# Altium PCB PWR_PCB_1_3.PcbDoc
Units mm, origin at the board's own origin, x right, y up, seen from the top; angles counter-clockwise.
Board outline 89 x 89 mm, 2 copper layers (Top Layer, Bottom Layer); 25 components, 9 nets, 60 pads, 0 vias.
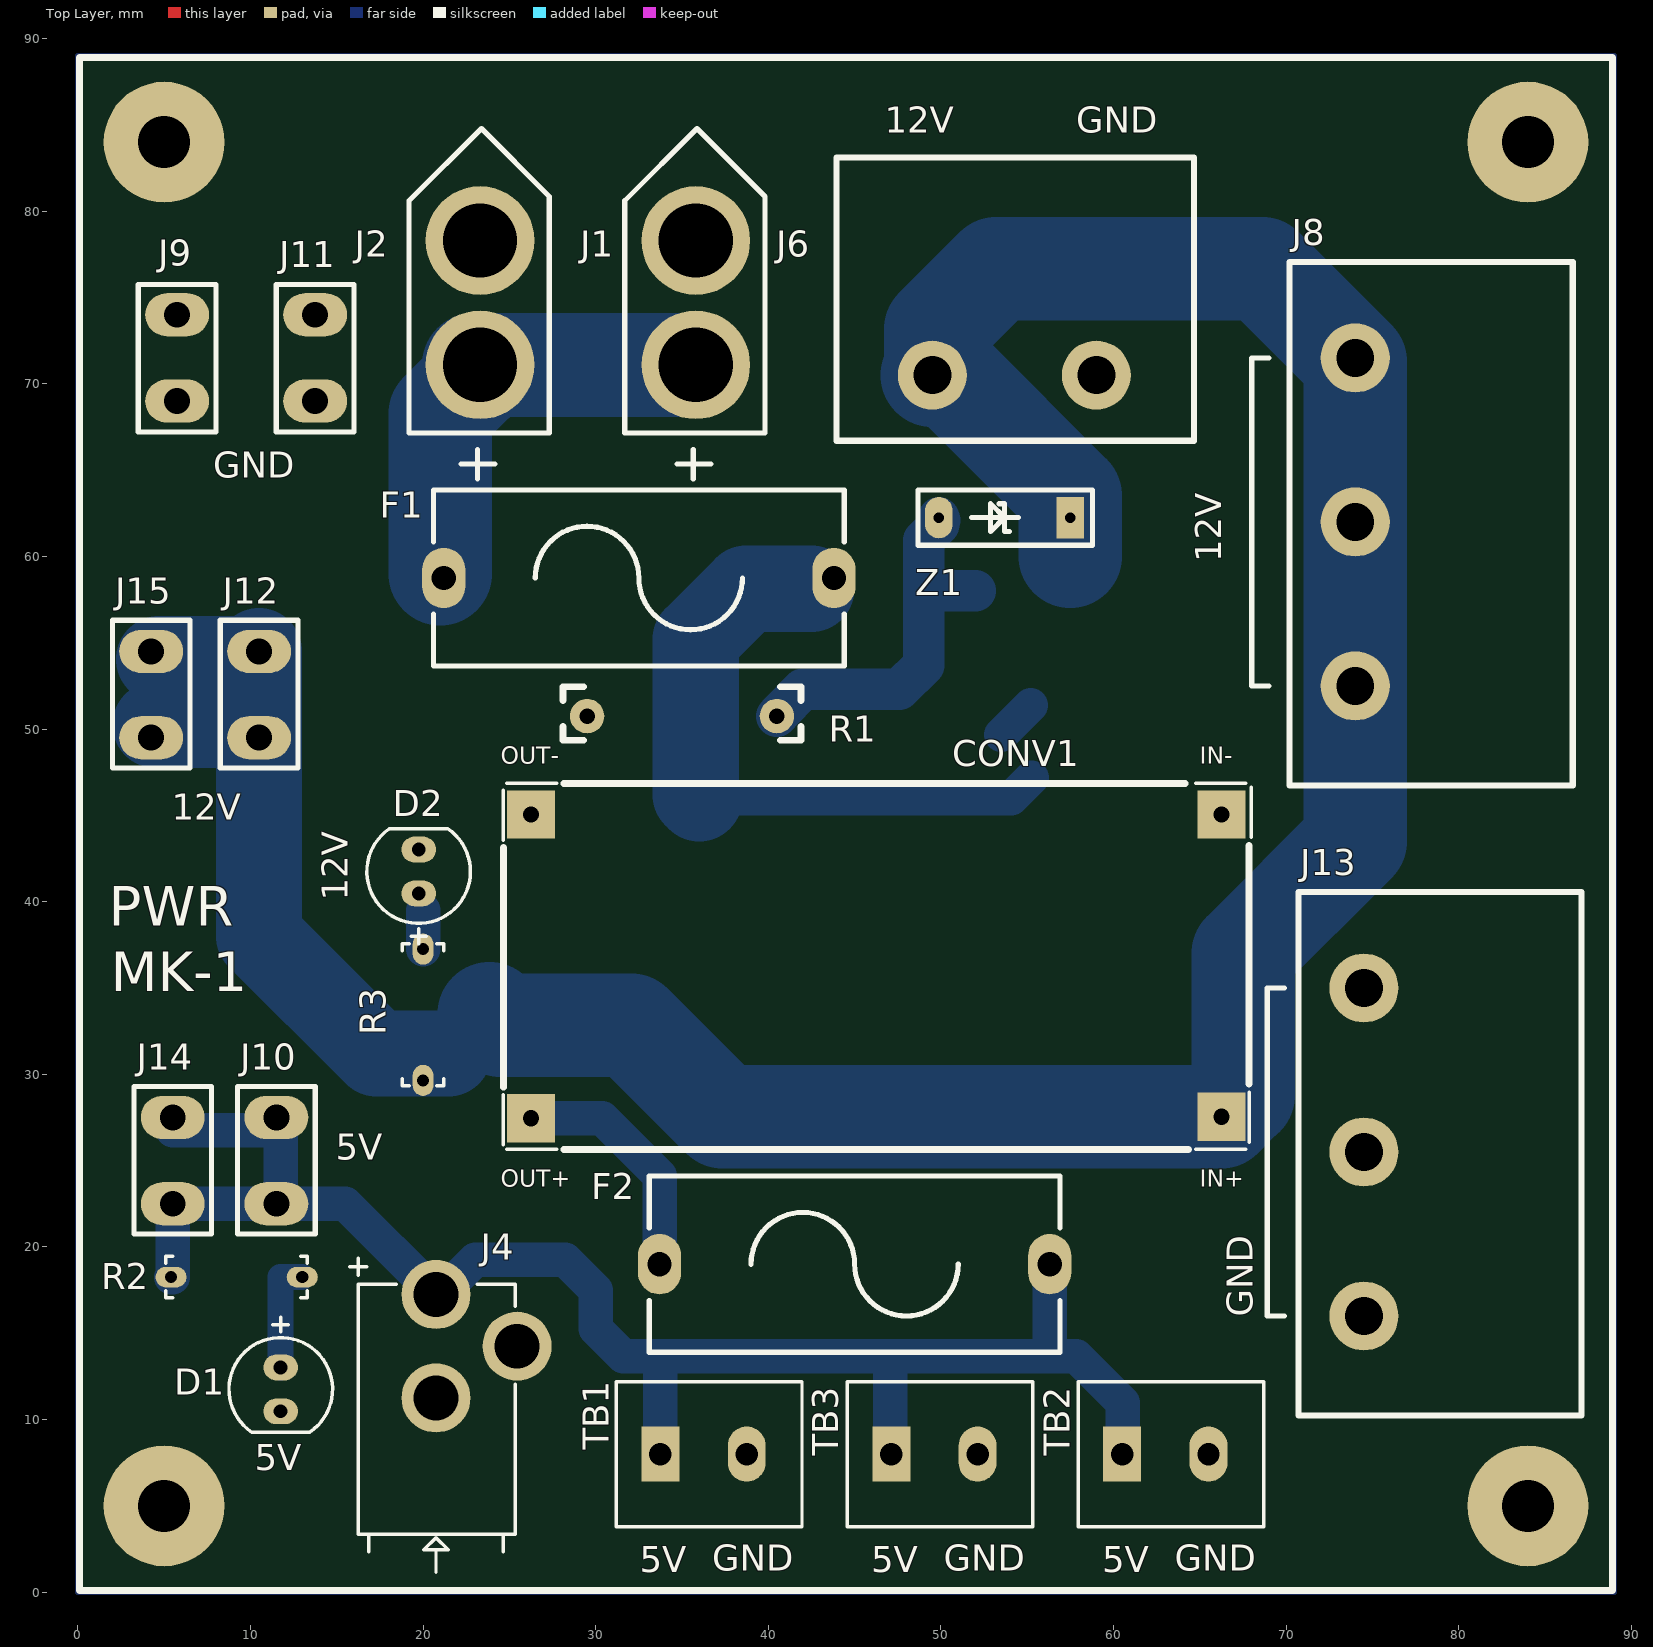
[diagram p0: Top Layer view]
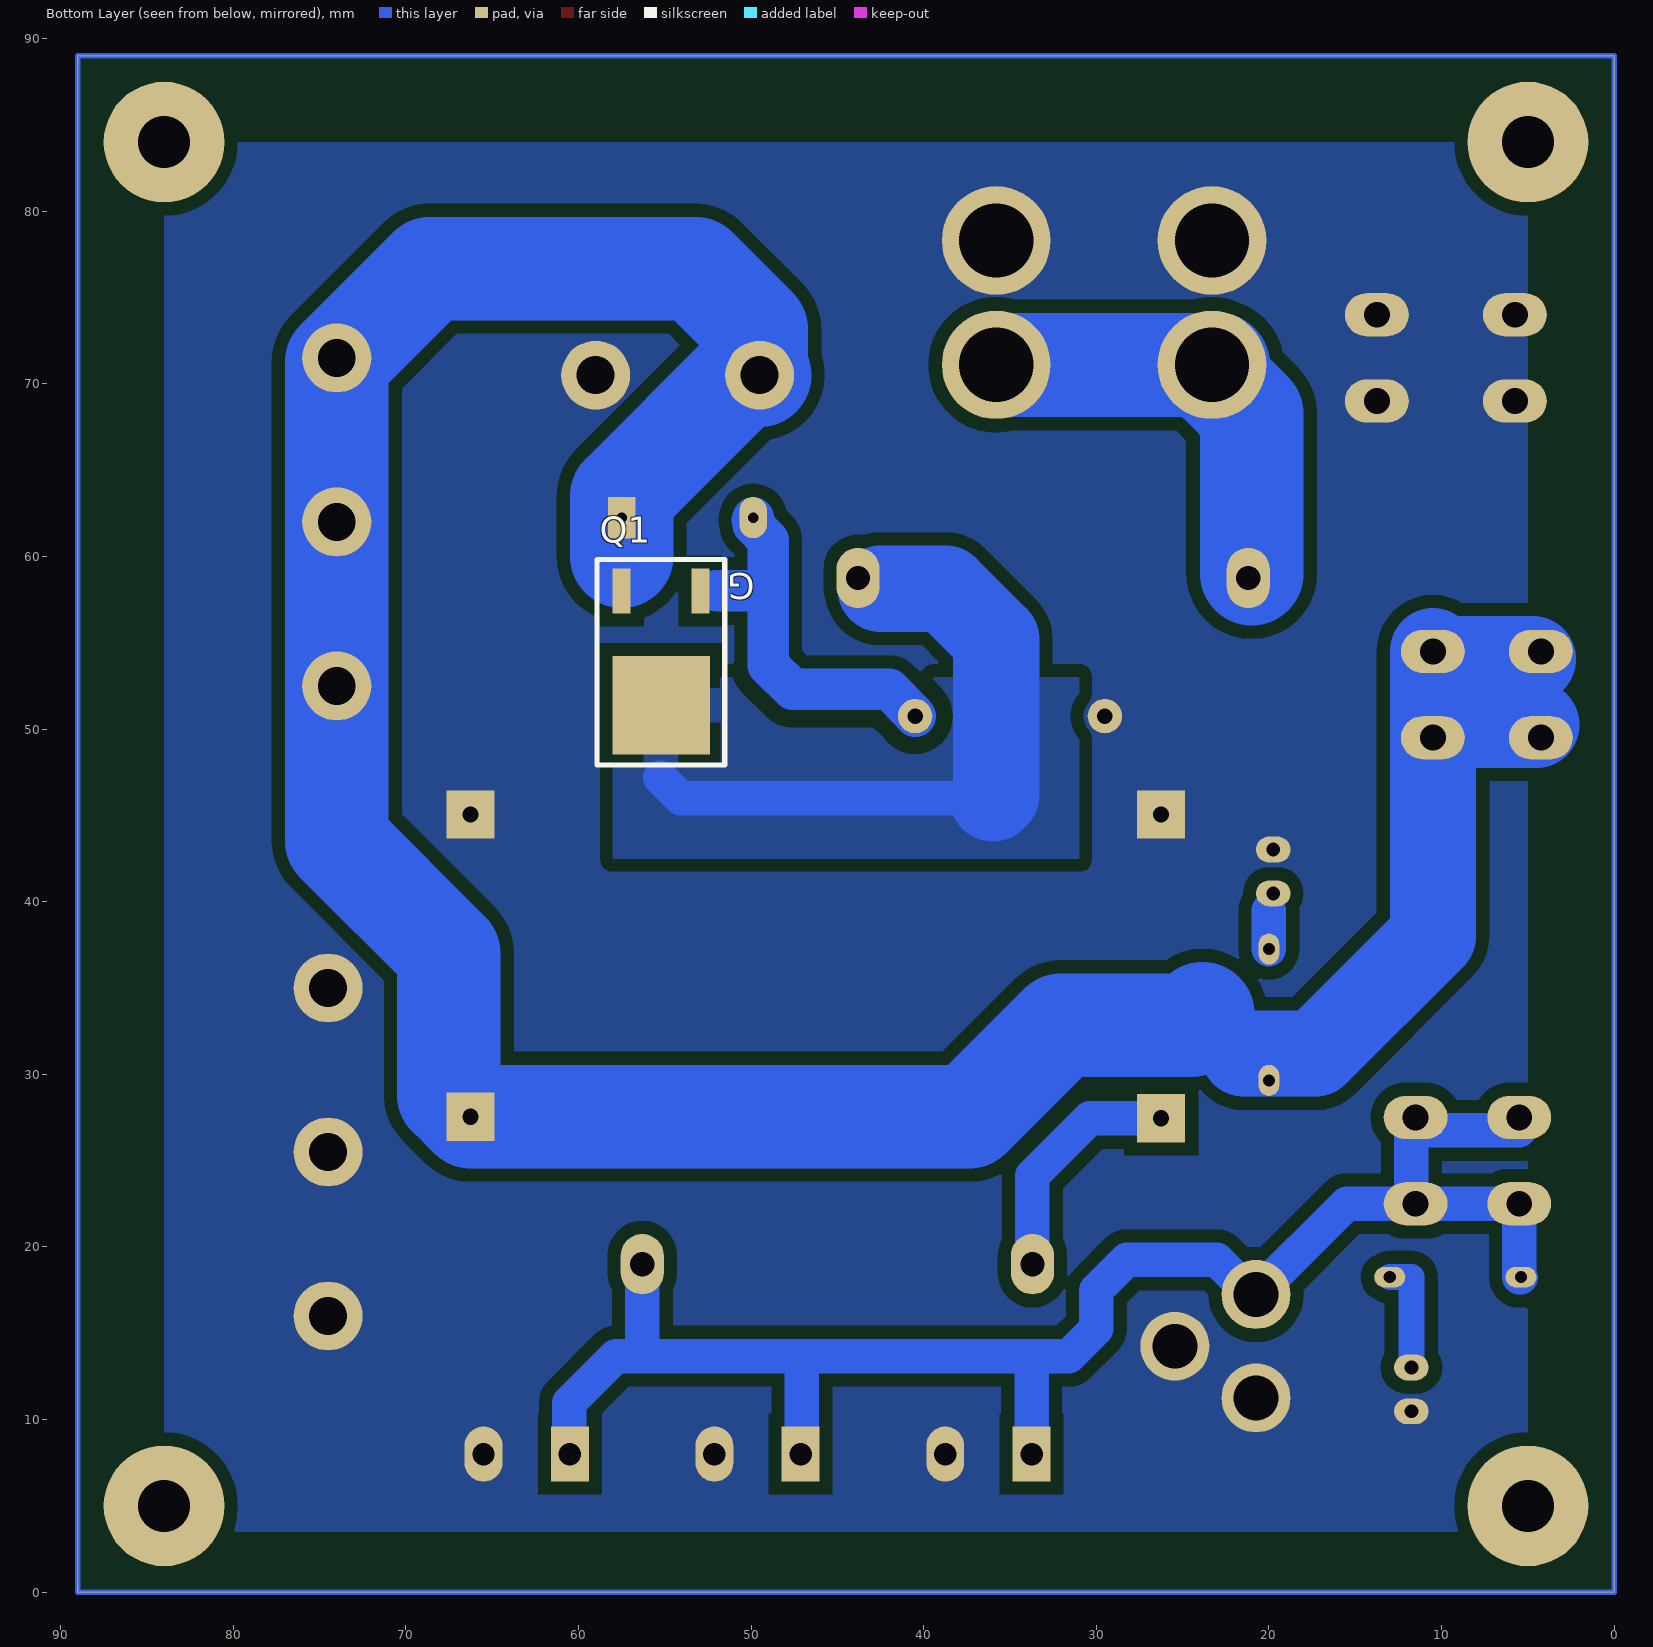
[diagram p1: Bottom Layer view, seen from below]

## Layer stack, top to bottom
Top Solder: solder mask 0.0102, Solder Resist, Dk 3.5
Top Layer: signal copper 0.0356
Dielectric 1: dielectric 0.32, FR-4, Dk 4.8
Bottom Layer: signal copper 0.0356
Bottom Solder: solder mask 0.0102, Solder Resist, Dk 3.5

## Board outline
0,0 89,0 89,89 0,89

## Design rules (kind name [scope] priority, off if disabled: settings)
Clearance [All] p1: gap=0.77 ignorepadtopadclearanceinfootprint=FALSE
PolygonConnect PolygonConnect_2 [All vs IsNamedPolygon('GND_L02_P001')] p1: thpad.connectstyle=Direct thpad.reliefconductorwidth=0.254 thpad.reliefentries=4 thpad.polygonreliefangle="90 Angle" thpad.airgapwidth=0.254 smdpad.connectstyle=Direct smdpad.reliefconductorwidth=0.254 smdpad.reliefentries=4 smdpad.polygonreliefangle="90 Angle" smdpad.airgapwidth=0.254 via.connectstyle=Relief via.reliefconductorwidth=0.254 via.reliefentries=4 via.polygonreliefangle="90 Angle" via.airgapwidth=0.254
PolygonConnect PolygonConnect_1 [All vs IsNamedPolygon('NETF1_2_L02_P000')] p2: thpad.connectstyle=Relief thpad.reliefconductorwidth=0.254 thpad.reliefentries=4 thpad.polygonreliefangle="90 Angle" thpad.airgapwidth=0.254 smdpad.connectstyle=Relief smdpad.reliefconductorwidth=2 smdpad.reliefentries=4 smdpad.polygonreliefangle="90 Angle" smdpad.airgapwidth=0.6 via.connectstyle=Relief via.reliefconductorwidth=0.254 via.reliefentries=4 via.polygonreliefangle="90 Angle" via.airgapwidth=0.254
RoutingVias [All] p1: holewidth=0.711 width=1.27 viastyle="Through Hole" minholewidth=0.711 minwidth=1.27 maxholewidth=0.711 maxwidth=1.27
SolderMaskExpansion [All] p1: expansion=0.102 istentingtop=FALSE
Width [All] p1: maxlimit=6 minlimit=0.6 preferedwidth=1
30 further rules are at their usual default settings.

## Components (designator, comment, footprint, x,y, rotation, side; value= is the part's Value field where it differs from the comment)
CONV1 "LM2596  DC-DC Step Down" DC_STP_DWN 46.25,36.25 r180 top
D1 "Red" LED_TH_2.54mm 11.75,11.75 r270 top
D2 "Red" LED_TH_2.54mm 19.75,41.75 r90 top
F1 "Fuse Holder T5x20" FUSE 32.5,58.75 r0 top
F2 "Fuse Holder T5x20" FUSE 45,19 r0 top
J1 "XT-60" XT-60_FEM 35.8,71.1 r0 top
J2 "XT-60" XT-60_FEM 23.3,71.1 r0 top
J4 "Barrel Power Jack" pwr_Jack 20.75,17.25 r180 top
J6 "Barrier TRM 1x2 9.5mm" BARRIER_9.5MM 49.5,70.5 r0 top
J8 "Barrier TRM 1x2 9.5mm" BARRIER_3_9.5MM 74,71.5 r270 top
J9 "PCB TERM 6.3mm" "PCB_TERM 6.3mm" 5.75,74 r270 top
J10 "PCB TERM 6.3mm" "PCB_TERM 6.3mm" 11.5,22.5 r90 top
J11 "PCB TERM 6.3mm" "PCB_TERM 6.3mm" 13.75,74 r270 top
J12 "PCB TERM 6.3mm" "PCB_TERM 6.3mm" 10.5,49.5 r90 top
J13 "Barrier TRM 1x2 9.5mm" BARRIER_3_9.5MM 74.5,35 r270 top
J14 "PCB TERM 6.3mm" "PCB_TERM 6.3mm" 5.5,22.5 r90 top
J15 "PCB TERM 6.3mm" "PCB_TERM 6.3mm" 4.25,49.5 r90 top
Q1 "AOD403" DPAK 52.928,58 r0 bottom
R1 "TH CFR-50 Resis" R_THT_CFR-50 35,50.75 r0 top
R2 "1k" R_THT_CFR-25 13,18.25 r180 top
R3 "1k" R_THT_CFR-25 20,37.25 r270 top
TB1 "TERM 1x2 5mm" TERMINAL_5MM 36.25,8 r90 top
TB2 "TERM 1x2 5mm" TERMINAL_5MM 63,8 r90 top
TB3 "TERM 1x2 5mm" TERMINAL_5MM 49.625,8 r90 top
Z1 "BZX55C9V1" DO-35 49.88,62.25 r0 top

## Footprints (in the part's own frame and the unit in brackets; to place one, negate y for a bottom-side part, rotate by r counter-clockwise, add the part's x,y. Pads: shape width x height; smd on the part's side, far side on the other; paste and mask are expansions set on the pad)
BARRIER_3_9.5MM [mm]
  round 4 hole 2.2: 1(0,0) 2(9.5,0) 3(19,0)
  silkscreen extent -5.55,-3.8 24.77,12.6, body extent -5.5,-3.73 24.6,12.47, height 20.61
BARRIER_9.5MM [mm]
  round 4 hole 2.2: 1(0,0) 2(9.5,0)
  silkscreen extent -5.55,-3.8 15.15,12.6, body extent -5.5,-3.73 15.1,12.47, height 20.61
DC_STP_DWN [mm]
  rect 2.8x2.8 hole 0.95: 1(-20,8.7) 2(-20,-8.8) 3(20,8.8) 4(20,-8.8)
  silkscreen extent -21.72,-10.6 21.6,10.6, body extent -21.5,-10.5 21.5,10.5, height 13.16
DO-35 [mm]
  oval 1.6x2.4 hole 0.6: A(0,0)
  rect 1.6x2.4 hole 0.6: K(7.62,0)
  silkscreen extent -1.2,-1.6 8.9,1.6, body extent -0.26,-1 7.86,1.01, height 2.01
DPAK [mm]
  rect 5.632x5.7 smd: D(2.275,6.625)
  rect 1.06x2.6 smd: G(0,0) S(4.572,0)
  silkscreen extent -1.4,-1.83 6,10.07, body extent -0.97,-0.5 5.53,8.2, height 2.3
FUSE [mm]
  oval 2.5x3.5 hole 1.4: 1(-11.3,0) 2(11.3,0)
  silkscreen extent -11.9,-5.1 11.9,5.1, body extent -11.55,-4.8 11.55,4.8, height 11.5
LED_TH_2.54mm [mm]
  oval 1.5x2 hole 0.8: 1(-1.27,0) 2(1.27,0)
  silkscreen extent -4.17,-2.99 2.49,3.01, body extent -3,-3 2.5,3, height 8.96
"PCB_TERM 6.3mm" [mm]
  oval 2.5x3.7 hole 1.5: 1(0,0) 2(5,0)
  silkscreen extent -1.75,-2.25 6.8,2.25, body extent -1.5,-0.4 6.5,0.4, height 10
pwr_Jack [mm]
  round 4 hole 2.6: 1(0,0) 2(-4.7,3) 3(0,6)
  silkscreen extent -4.6,-2.1 5,16.1, body extent -4.8,-0.6 4.5,13.8, height 11.01
R_THT_CFR-25 [mm]
  oval 1.8x1.2 hole 0.7: 1(0,0) 2(7.6,0)
  silkscreen extent -0.3,-1.2 7.9,1.2, body extent -0.28,-1.2 7.89,1.2, height 1.9
R_THT_CFR-50 [mm]
  round 2 hole 0.9: 1(-5.5,0) 2(5.5,0)
  silkscreen extent -6.9,-1.4 6.9,1.7, body extent -7.4,-1.35 7.6,1.75, height 3.05
TERMINAL_5MM [mm]
  rect 3.2x2.2 hole 1.3: 1(0,2.5)
  oval 3.2x2.2 hole 1.3: 2(0,-2.5)
  silkscreen extent -4.2,-5.7 4.2,5.05, body extent -4.08,-5.58 4.07,4.98, height 10.01
XT-60_FEM [mm]
  round 6.3 hole 4.3: 1(0,0) 2(0,7.2)
  silkscreen extent -4.11,-6.6 4.01,13.69, body extent -4.12,-4.05 4.01,11.89, height 15.39

## Part data
CONV1: library part "Buck Conv.", "Conv DC-DC 4.5V to 40V Inv/Step Down Single-Out 1.2V to 37V 3A 6-Pin(5+Tab) TO-263 Tube", Case/Package=TO-263, Manufacturer 1="Texas Instruments", Manufacturer Part Number 1=LM2596S-ADJ/NOPB, Max Input Voltage=40V, Max Operating Temperature=125°C, Max Output Current=3A, Max Output Voltage=37V, Min Input Voltage=4.5V, Min Operating Temperature=-40°C, Min Output Voltage=1.2V, Quiescent Current=5mA, Supplier Part Number 1=LM2596S-ADJ/NOPB-ND, Switching Frequency=173kHz, ComponentLink1Description=https://datasheet.ciiva.com/27056/2051160-27056491.pdf?src-supplier=Jameco, ComponentLink1URL=https://datasheet.ciiva.com/27056/2051160-27056491.pdf?src-supplier=Jameco, ComponentLink2Description=https://datasheet.ciiva.com/15112/getdatasheetpartid-55559-15112636.pdf?src-supplier=Verical, ComponentLink2URL=https://datasheet.ciiva.com/15112/getdatasheetpartid-55559-15112636.pdf?src-supplier=Verical, ComponentLink3Description=https://datasheet.ciiva.com/41457/001013814-da-01-en-ic-reg-buc-lm2596s-adj-nopb-to-263-5-tid-41457756.pdf?src-supplier=Conrad, ComponentLink3URL=https://datasheet.ciiva.com/41457/001013814-da-01-en-ic-reg-buc-lm2596s-adj-nopb-to-263-5-tid-41457756.pdf?src-supplier=Conrad, ComponentLink4Description=https://datasheet.ciiva.com/6596/lm2596-6596342.pdf?src-supplier=Digi-Key, ComponentLink4URL=https://datasheet.ciiva.com/6596/lm2596-6596342.pdf?src-supplier=Digi-Key, ComponentLink5Description=https://datasheet.ciiva.com/22669/1874590-22669464.pdf?src-supplier=Element14, ComponentLink5URL=https://datasheet.ciiva.com/22669/1874590-22669464.pdf?src-supplier=Element14, ComponentLink6Description=https://datasheet.ciiva.com/14150/jqlm2596x-xx-e-14150653.pdf?src-supplier=Distrelec, ComponentLink6URL=https://datasheet.ciiva.com/14150/jqlm2596x-xx-e-14150653.pdf?src-supplier=Distrelec, ComponentLink7Description=https://octopart.com/click/track?ai=10049&ct=datasheets&sig=08a4c86&at=physicalpart&sid=370&ppid=24812941&hlid=29972682&src-supplier=TI+store, ComponentLink7URL=https://octopart.com/click/track?ai=10049&ct=datasheets&sig=08a4c86&at=physicalpart&sid=370&ppid=24812941&hlid=29972682&src-supplier=TI+store, ComponentLink8Description=http://datasheet.octopart.com/LM2596S-ADJ-NOPB-Texas-Instruments-datasheet-34438175.pdf?src-supplier=TME, ComponentLink8URL=http://datasheet.octopart.com/LM2596S-ADJ-NOPB-Texas-Instruments-datasheet-34438175.pdf?src-supplier=TME, ComponentLink9Description=http://datasheet.octopart.com/LM2596S-ADJ/NOPB-Texas-Instruments-datasheet-10621667.pdf?src-supplier=Verical, ComponentLink9URL=http://datasheet.octopart.com/LM2596S-ADJ/NOPB-Texas-Instruments-datasheet-10621667.pdf?src-supplier=Verical, ComponentLink10Description=http://datasheet.octopart.com/LM2596S-ADJ-NOPB-Texas-Instruments-datasheet-14775467.pdf?src-supplier=TI+store, ComponentLink10URL=http://datasheet.octopart.com/LM2596S-ADJ-NOPB-Texas-Instruments-datasheet-14775467.pdf?src-supplier=TI+store, ComponentLink11Description=http://sigma.octopart.com/49250911/technical_drawing/Texas-Instruments-LM2596S-ADJ-NOPB.pdf?src-supplier=TI+store, ComponentLink11URL=http://sigma.octopart.com/49250911/technical_drawing/Texas-Instruments-LM2596S-ADJ-NOPB.pdf?src-supplier=TI+store, ComponentLink12Description=http://datasheet.octopart.com/LM2596S-ADJ/NOPB-National-Semiconductor-datasheet-6038.pdf?src-supplier=Future+Electronics, ComponentLink12URL=http://datasheet.octopart.com/LM2596S-ADJ/NOPB-National-Semiconductor-datasheet-6038.pdf?src-supplier=Future+Electronics, ComponentLink13Description=http://datasheet.octopart.com/LM2596S-ADJ-NOPB-Texas-Instruments-datasheet-21076667.pdf?src-supplier=Newark, ComponentLink13URL=http://datasheet.octopart.com/LM2596S-ADJ-NOPB-Texas-Instruments-datasheet-21076667.pdf?src-supplier=Newark, ComponentLink14Description=http://datasheet.octopart.com/LM2596S-ADJ-NOPB-Texas-Instruments-datasheet-9136.pdf?src-supplier=Element14, ComponentLink14URL=http://datasheet.octopart.com/LM2596S-ADJ-NOPB-Texas-Instruments-datasheet-9136.pdf?src-supplier=Element14, ComponentLink15Description=http://datasheet.octopart.com/LM2596S-ADJ-NOPB-Texas-Instruments-datasheet-65712979.pdf?src-supplier=Newark, ComponentLink15URL=http://datasheet.octopart.com/LM2596S-ADJ-NOPB-Texas-Instruments-datasheet-65712979.pdf?src-supplier=Newark, ComponentLink16Description=http://datasheet.octopart.com/LM2596S-ADJ-NOPB-Texas-Instruments-datasheet-8528656.pdf?src-supplier=Element14, ComponentLink16URL=http://datasheet.octopart.com/LM2596S-ADJ-NOPB-Texas-Instruments-datasheet-8528656.pdf?src-supplier=Element14, ComponentLink17Description=http://datasheet.octopart.com/LM2596S-ADJ-NOPB-Texas-Instruments-datasheet-10845692.pdf?src-supplier=Element14, ComponentLink17URL=http://datasheet.octopart.com/LM2596S-ADJ-NOPB-Texas-Instruments-datasheet-10845692.pdf?src-supplier=Element14, ComponentLink18Description=http://datasheet.octopart.com/LM2596S-ADJ-NOPB-Texas-Instruments-datasheet-7596510.pdf?src-supplier=Jameco, ComponentLink18URL=http://datasheet.octopart.com/LM2596S-ADJ-NOPB-Texas-Instruments-datasheet-7596510.pdf?src-supplier=Jameco, ComponentLink19Description=http://datasheet.octopart.com/LM2596S-ADJ-NOPB-Texas-Instruments-datasheet-62342754.pdf?src-supplier=TME, ComponentLink19URL=http://datasheet.octopart.com/LM2596S-ADJ-NOPB-Texas-Instruments-datasheet-62342754.pdf?src-supplier=TME, ComponentLink20Description=http://datasheet.octopart.com/LM2596S-ADJ-NOPB-Texas-Instruments-datasheet-17726397.pdf?src-supplier=Upverter, ComponentLink20URL=http://datasheet.octopart.com/LM2596S-ADJ-NOPB-Texas-Instruments-datasheet-17726397.pdf?src-supplier=Upverter, ComponentLink21Description=http://datasheet.octopart.com/LM2596S-ADJ/NOPB-National-Semiconductor-datasheet-9599829.pdf?src-supplier=Allied+Electronics, ComponentLink21URL=http://datasheet.octopart.com/LM2596S-ADJ/NOPB-National-Semiconductor-datasheet-9599829.pdf?src-supplier=Allied+Electronics, Contact Plating=Tin, Efficiency=73%, Height=4.57mm, Lead Free="Contains Lead", Length=10.16mm, Mount="Surface Mount", Number of Outputs=1, Number of Pins=5, Operating Supply Voltage=40V, Output Current=3A, Output Type=Adjustable, Output Voltage=37V, Parameter Name 1=Rail/Tube, Pricing 1="1=5.72000, 10=5.14100, 25=4.86000, 100=3.99600, 250=3.58560, 500=3.45600, 1000=2.87280, 2500=2.76480, 5000=2.67840 (USD)", Radiation Hardening=No, REACH SVHC="No SVHC", Stock 1=4513, Supplier 1=Digi-Key, Weight=0.056128oz, Width=8.64mm
D1 D2: library part "TH Red LED 5mm", "LED RED DIFF 5MM OVAL T/H", Case/Package=Radial, Forward Voltage=2.1V, Manufacturer 1="Marktech Optoelectronics", Manufacturer Part Number 1=MT5470E-UR, Package Quantity=5000, Supplier Part Number 1=1125-1193-ND, Test Current=20mA, Color=Red, ComponentLink1Description=https://datasheet.ciiva.com/18614/mt5470e-ur-18614243.pdf?src-supplier=Digi-Key, ComponentLink1URL=https://datasheet.ciiva.com/18614/mt5470e-ur-18614243.pdf?src-supplier=Digi-Key, Dominant Wavelength=625nm, Height=7.8mm, Lens Color=Red, Lens Style=Diffused,Tinted, Lens Transparency=Diffused, Luminous Intensity=2300mcd, Mount="Through Hole", Parameter Name 1=Bulk, Pricing 1="1=0.61000, 10=0.44100, 100=0.28800, 500=0.20700, 1000=0.16200, 2500=0.14850, 5000=0.13500, 10000=0.12600, 25000=0.12150 (USD)", RoHS=Yes, Stock 1=7117, Supplier 1=Digi-Key, Viewing Angle=70°
F1 F2: library part FUSE_T5x20
J1 J2: library part "XT-60 Power Female Con.", "XT60 CONNECTORS MALE/FEMALE PAIR", Manufacturer 1=SparkFun, Manufacturer Part Number 1=PRT-10474, Supplier Part Number 1=1568-1816-ND, ComponentLink1Description=https://cdn.sparkfun.com/datasheets/Prototyping/xt60.pdf?src-supplier=Digi-Key, ComponentLink1URL=https://cdn.sparkfun.com/datasheets/Prototyping/xt60.pdf?src-supplier=Digi-Key, Pricing 1="1=1.50000 (USD)", RoHS=No, Stock 1=3168, Supplier 1=Digi-Key
J4: library part Con-Jack, "DC-Power Socket 12V 5A 2, 1mm Solder Eyel", Current Rating=5A, Manufacturer 1=Cliff, Manufacturer Part Number 1=FC68148, Supplier Part Number 1=735742, ComponentLink1Description=http://www.farnell.com/datasheets/317160.pdf?src-supplier=Farnell, ComponentLink1URL=http://www.farnell.com/datasheets/317160.pdf?src-supplier=Farnell, ComponentLink2Description=http://www.rapidonline.com/pdf/735742_da_en_01.pdf?src-supplier=Rapid+Electronics, ComponentLink2URL=http://www.rapidonline.com/pdf/735742_da_en_01.pdf?src-supplier=Rapid+Electronics, ComponentLink3Description=http://www.produktinfo.conrad.com/datenblaetter/725000-749999/735742-da-01-en-DC_BUCHSE_2_1MM_FC68148.pdf?src-supplier=Conrad, ComponentLink3URL=http://www.produktinfo.conrad.com/datenblaetter/725000-749999/735742-da-01-en-DC_BUCHSE_2_1MM_FC68148.pdf?src-supplier=Conrad, Connector Type=Socket, Height=0.25inch, Inside Diameter=6.3mm, Length=5inch, Orientation="Right Angle", Parameter Name 1=Bulk, RoHS=Yes, Supplier 1=Conrad, Weight=0.1lb, Width=3inch
J6: library part "Barrier BLK", "CONN BARRIER STRIP 2CIRC 0.374\"", Color=Black, Current Rating=30A, Flammability Rating="UL94 V-0", Manufacturer 1="On-Shore Technology", Manufacturer Part Number 1=OSTYK44102030, Max Operating Temperature=105°C, Min Operating Temperature=-40°C, Supplier Part Number 1=ED2971-ND, Voltage Rating=300V, ComponentLink1Description=https://datasheet.ciiva.com/778/ostyk441xx030-778584.pdf?src-supplier=Digi-Key, ComponentLink1URL=https://datasheet.ciiva.com/778/ostyk441xx030-778584.pdf?src-supplier=Digi-Key, Insulation Material=Nylon, Mount="Through Hole", Number of Circuits=2, Number of Rows=1, Number of Wire Entries=2, Parameter Name 1=Bulk, Pitch=0.374inch, Pricing 1="1=1.22000, 10=0.76100, 25=0.65160, 50=0.58560, 100=0.57340, 250=0.48800, 500=0.46360, 1000=0.41480, 5000=0.32452 (USD)", RoHS=Yes, Stock 1=3505, Supplier 1=Digi-Key, Wire Gauge (Max)=22AWG, Wire Gauge (Min)=10AWG
J8 J13: library part "Barrier BLK_3", "CONN BARRIER STRIP 3CIRC 0.374\"", Color=Black, Current Rating=30A, Flammability Rating="UL94 V-0", Manufacturer 1="On-Shore Technology", Manufacturer Part Number 1=OSTYK44102030, Max Operating Temperature=105°C, Min Operating Temperature=-40°C, Supplier Part Number 1=ED2971-ND, Voltage Rating=300V, ComponentLink1Description=https://datasheet.ciiva.com/778/ostyk441xx030-778584.pdf?src-supplier=Digi-Key, ComponentLink1URL=https://datasheet.ciiva.com/778/ostyk441xx030-778584.pdf?src-supplier=Digi-Key, Insulation Material=Nylon, Mount="Through Hole", Number of Circuits=2, Number of Rows=1, Number of Wire Entries=2, Parameter Name 1=Bulk, Pitch=0.374inch, Pricing 1="1=1.22000, 10=0.76100, 25=0.65160, 50=0.58560, 100=0.57340, 250=0.48800, 500=0.46360, 1000=0.41480, 5000=0.32452 (USD)", RoHS=Yes, Stock 1=3505, Supplier 1=Digi-Key, Wire Gauge (Max)=22AWG, Wire Gauge (Min)=10AWG
J9 J10 J11 J12 J14 J15: library part "PCB Terminal", Color=Black, Contact Current Rating=5A, Contact Resistance=6mR, Flammability Rating="UL94 V-0", Manufacturer 1="TE Connectivity", Manufacturer Part Number 1=2-644861-2, Max Operating Temperature=221°C, Max Voltage Rating (AC)=250V, Min Operating Temperature=-67°C, Package Quantity=500, Supplier Part Number 1=A30931-ND, Approvals=CSA, Backwall/Post Interruptions="No (Without)", ComponentLink1Description=https://datasheet.ciiva.com/16303/eng-ds-82056-mta-0608-16303634.pdf?src-supplier=Future+Electronics, ComponentLink1URL=https://datasheet.ciiva.com/16303/eng-ds-82056-mta-0608-16303634.pdf?src-supplier=Future+Electronics, ComponentLink2Description=https://datasheet.ciiva.com/30111/8852eng-ds-82056-mta-0608-30111398.pdf?src-supplier=Onlinecomponents.com, ComponentLink2URL=https://datasheet.ciiva.com/30111/8852eng-ds-82056-mta-0608-30111398.pdf?src-supplier=Onlinecomponents.com, ComponentLink3Description=https://datasheet.ciiva.com/709/eng-cd-644861-n-basefilename-709739.pdf?src-supplier=Digi-Key, ComponentLink3URL=https://datasheet.ciiva.com/709/eng-cd-644861-n-basefilename-709739.pdf?src-supplier=Digi-Key, ComponentLink4Description=https://datasheet.ciiva.com/3118/eng-ds-82056-mta-0608-3118126.pdf?src-supplier=Avnet, ComponentLink4URL=https://datasheet.ciiva.com/3118/eng-ds-82056-mta-0608-3118126.pdf?src-supplier=Avnet, Connector System=Wire-to-Board, Connector Type=Plug,Header,Pin, Contact Gender=Male, Contact Material="Copper Alloy", Contact Mating Length=5.1mm, Contact Plating=Tin,Matte, Contact Post Length=3.56mm, Contact Retention="No (Without)", Contact Shape=Square, Contact Style=Straight, Current Rating=5A, Depth=7.95mm, ELV=Compliant, Fastening Type=Friction, Gender=Male, Height=10.41mm, Housing Color=Black, Housing Material=Polyester, Lead Free="Lead Free", Length=7.21mm, Mating Alignment="Yes (With)", Mating Retention="Yes (With)", Mount="Through Hole", Number of Contacts=2, Number of Positions=2, Number of Rows=1, Orientation=Straight, Packaging=Bag, PCB Mount Alignment="No (Without)", PCB Mount Retention=Without, PCB Mounting Orientation=Vertical, PCB Thickness=0.063inch, Pitch=2.54mm, Plating Thickness=6.3um, Pricing 1="1=0.41000, 10=0.39200, 100=0.27420, 500=0.23506, 1000=0.19588, 5000=0.16790, 10000=0.15670 (USD)", Radiation Hardening=No, REACH SVHC=Unknown, RoHS=Yes, Sealable="No (Without)", Shrouded="Yes (With)", Stock 1=3206, Strain Relief="No (Without)", Supplier 1=Digi-Key, Tail Length=3.56mm, Termination=Solder, Underplate Material=Nickel, Voltage Rating=250V, Voltage Rating (AC)=250V
Q1: "MOSFET Transistor P-Channel 30V 15A 3.5V @ 250uA 6mΩ @ 20A,20V 2.5W TO-252-2(DPAK)"
R1: "General Type Carbon Film Resistor 330Ohm 1/2W 5% Axial Bulk", Case/Package=Axial, Manufacturer 1=Yageo, Manufacturer Part Number 1=CFR-50JB-52-330R, Max Operating Temperature=155°C, Max Power Dissipation=500mW, Min Operating Temperature=-55°C, Package Quantity=200, Resistance=330R, Resistor Type="Carbon Film", Temperature Coefficient=500ppm/°C, Tolerance=5%, ComponentLink1Description=http://www.yageo.com/documents/recent/Yageo%20LR_CFR_2013.pdf?src-supplier=Digi-Key, ComponentLink1URL=http://www.yageo.com/documents/recent/Yageo%20LR_CFR_2013.pdf?src-supplier=Digi-Key, Length=0.354inch, Number of Terminations=2, Packaging=Bulk, Pricing 1="1=0.11000, 10=0.09800, 25=0.06800, 50=0.05300, 100=0.03780, 250=0.02948, 500=0.02344, 1000=0.01663, 5000=0.01285 (USD)", RoHS=Yes, Stock 1=1637, Supplier 1=Digi-Key
R2 R3: library part "TH CFR-25 Resis", "CFR Series 0.25 W 1 KOhm ±5 % -350 to 500 ppm/°C Carbon Film Resistor", Case/Package=Axial, Manufacturer 1=Yageo, Manufacturer Part Number 1=CFR-25JB-52-1K, Max Operating Temperature=155°C, Max Power Dissipation=250mW, Min Operating Temperature=-55°C, Package Quantity=200, Resistance=1kR, Resistor Type="Carbon Film", Supplier Part Number 1=1.0KQBK-ND, Temperature Coefficient=500ppm/°C, Tolerance=5%, ComponentLink1Description=http://www.yageo.com/NewPortal/yageodocoutput?fileName=/pdf/throughhole/Yageo_LR_CFR_2013.pdf&src-supplier=Digi-Key, ComponentLink1URL=http://www.yageo.com/NewPortal/yageodocoutput?fileName=/pdf/throughhole/Yageo_LR_CFR_2013.pdf&src-supplier=Digi-Key, ComponentLink2Description=http://www.yageo.com/documents/recent/General%20Type_CFR.pdf?src-supplier=Future+Electronics, ComponentLink2URL=http://www.yageo.com/documents/recent/General%20Type_CFR.pdf?src-supplier=Future+Electronics, Lead Free="Lead Free", Length=0.248inch, Number of Terminations=2, Parameter Name 1=Bulk, Power Rating=250mW, Pricing 1="1=0.10000, 25=0.04680, 50=0.03640, 100=0.02600, 250=0.02028, 500=0.01612, 750=0.01379, 1000=0.01144, 2000=0.00988 (USD)", RoHS=Yes, Stock 1=194074, Supplier 1=Digi-Key
TB1 TB2 TB3: library part "Terminal BLK Green", "PHOENIX CONTACT         MKDSN 1,5/ 2             Wire-To-Board Terminal Block, 5 mm, 2 Ways, 26 AWG, 16 AWG, 1.5 mm, Screw", Color=Green, Current=10A, Current Rating=13.5A, Flammability Rating="UL94 V-0", Manufacturer 1="Phoenix Contact", Manufacturer Part Number 1=1729018, Max Supply Voltage=250V, Package Quantity=50, Supplier Part Number 1=651-1729018, Voltage=300V, Voltage Rating=400V, Approvals=UL,CSA,cULus,CB, ComponentLink1Description=https://datasheet.ciiva.com/16071/1729018-16071814.pdf?src-supplier=Onlinecomponents.com, ComponentLink1URL=https://datasheet.ciiva.com/16071/1729018-16071814.pdf?src-supplier=Onlinecomponents.com, ComponentLink2Description=https://datasheet.ciiva.com/832/1729018-832055.pdf?src-supplier=Digi-Key, ComponentLink2URL=https://datasheet.ciiva.com/832/1729018-832055.pdf?src-supplier=Digi-Key, ComponentLink3Description=https://datasheet.ciiva.com/15169/getdatasheetpartid-177860-15169643.pdf?src-supplier=Verical, ComponentLink3URL=https://datasheet.ciiva.com/15169/getdatasheetpartid-177860-15169643.pdf?src-supplier=Verical, ComponentLink4Description=https://datasheet.ciiva.com/14607/70054375-14607356.pdf?src-supplier=Allied+Electronics, ComponentLink4URL=https://datasheet.ciiva.com/14607/70054375-14607356.pdf?src-supplier=Allied+Electronics, ComponentLink5Description=https://datasheet.ciiva.com/33105/1729018-33105978.pdf?src-supplier=Today+Components, ComponentLink5URL=https://datasheet.ciiva.com/33105/1729018-33105978.pdf?src-supplier=Today+Components, Connector Type=Screw, Contact Material=Tin, Depth=8.1mm, Gender=Male, Height=13.5mm, Housing Color=Green, Housing Material=Polyamide, Insulation Material=Nylon, Lead Free="Lead Free", Length=8.1mm, Material=Polyamide, Max Current Rating=13.5A, Mount="Through Hole", Number of Circuits=2, Number of Contacts=2, Number of Levels=1, Number of Pins=2, Number of Poles=2, Number of Positions=2, Number of Positions Per Level=2, Number of Rows=1, Orientation=Straight, Parameter Name 1=Bulk, Pitch=5mm, Pricing 1="1=1.10000, 10=1.05000, 50=1.01000, 100=0.97400, 250=0.91000, 500=0.83800 (USD)", Radiation Hardening=No, REACH SVHC=Unknown, RoHS=Yes, Stock 1=6371, Stripping Length=6mm, Supplier 1=Mouser, Termination=Screw, Weight=0.06949oz, Width=13.5mm, Wire Gauge (Max)=26AWG, Wire Gauge (Min)=26AWG, Wire/Cable Gauge=26AWG
Z1: library part Zener_DO-35, "TH Zener Diode DO-35"

## Free pads (board coordinates)
  round 7 hole 3: 1(5,5) 1(5,84) 1(84,5) 1(84,84)

## Nets (pads, with @x,y where several pads share a name; then routed paths per layer and width w, separated by ;. In a path a pad name is that pad's centre, name@x,y a point inside that pad or via, vN(x,y) a via of type N, cw(c..) or ccw(c..) an arc to the next point about the centre after c; other vN are vias at no path point)
+5: F2.2 J4.1 J10.1 J10.2 J14.1 J14.2 R2.2 TB1.1 TB2.1 TB3.1 | length 98.6
  Bottom Layer w2: R2.2 5.5,18.25 J14.1 J10.1 15.5,22.5 J4.1 21.021,17.25 23.021,19.25 28.243,19.25 30,17.493 30,15.257 31.586,13.672 33.5,13.672 ; J14.2@5.5,26.75 11.5,26.75 J10.2@11.75,26.5 ; J10.1@11.75,23.25 J10.2@11.75,26.5 ; J10.2@11.75,27.25 J10.2@11.75,26.5 ; TB1.1@33.75,7.5 33.75,13.422 33.5,13.672 ; TB3.1@47.05,7.5 47.05,13.372 46.75,13.672 ; F2.2 56.3,14.222 55.75,13.672 ; TB2.1 60.529,8.029 60.529,10.971 57.828,13.672 55.75,13.672 ; 33.5,13.672 46.75,13.672 ; 46.75,13.672 55.75,13.672
+12: CONV1.1 J6.1 J8.1 J8.2 J8.3 J12.1 J12.2 J15.1 J15.2 Q1.S R3.2 Z1.K | length 180.9
  Bottom Layer w4: 21.5,31.15 23.85,33.5
  Bottom Layer w5: J15.1@4.5,50.25 J12.1@9.842,50.25 ; J15.2@4.704,54.046 J12.2@10.046,54.046 ; J12.2 J12.1 10.5,38 17.3,31.2 21.45,31.2
  Bottom Layer w6: 23.85,33.5 24.5,32.85 32.05,32.85 37.35,27.55 CONV1.1 67.5,28.8 67.5,37 74,43.5 J8.3 J8.2 74,71.288 68.62,76.667 53.206,76.667 49.691,73.153 J6.1@49.691,70.691 ; J6.1 50.5,70.5 57.5,63.5 Z1.K 57.5,60
GND: CONV1.2 CONV1.4 D1.2 D2.2 J1.2 J2.2 J4.2 J4.3 J6.2 J9.1 J9.2 J11.1 J11.2 J13.1 J13.2 J13.3 R1.1 TB1.2 TB2.2 TB3.2
NetCONV1_3: CONV1.3 F2.1 | length 14
  Bottom Layer w2: CONV1.3 30.379,27.45 33.7,24.129 F2.1
NetD1_1: D1.1 R2.1 | length 6.5
  Bottom Layer w1.5: D1.1 11.75,18.25 R2.1
NetD2_1: D2.1 R3.1 | length 2.2
  Bottom Layer w2: R3.1 20,39.5
NetF1_2: F1.2 Q1.D | length 40
  Bottom Layer w2: 36,46 54.076,46 55.248,47.172 ; F1.2@43.569,58.154 43.8,58.385 F1.2 ; Q1.D@53.498,49.67 Q1.D
  Bottom Layer w5: 36,46 35.8,46.2 35.8,55.196 38.729,58.125 42.5,58.125
NetQ1_G: Q1.G R1.2 Z1.A | length 21.7
  Bottom Layer w2.4: R1.2 40.596,50.846 40.596,50.894 42.002,52.3 47.594,52.3 49,53.706 49,58 ; Z1.A Z1.A@49.88,62.149 ; Z1.A@49.926,62.103 Z1.A@49.88,62.149 ; 52,58 49,58 ; 49,58 49,60.943 49.88,61.823 Z1.A@49.88,62.149
VIN: F1.1 J1.1 J2.1 | length 25.4
  Bottom Layer w6: F1.1@21,59 21,68.272 22.924,70.195 22.924,71.088 J1.1@35.424,71.088
copper on no net: | length 356
  Bottom Layer w0.3: 0,0 89,0 89,89 0,89 0,0

## Polygon pours and split planes (outlines as drawn)
GND on Bottom Layer "GND_L02_P001" (solid, pour order 1): 5,84 5,3.5 84,3.5 84,84
NetF1_2 on Bottom Layer "NETF1_2_L02_P000" (solid, pour order 0): 31,53 31,42.5 58,42.5 58,53

## Silkscreen, mask and mechanical layers (free items; w line width, h text height)
Top Overlay:
  lines w0.3: 69,52.5 68,52.5 68,71.5 69,71.5 ; 69.9,16 68.9,16 68.9,35 69.9,35
  lines w0.4: 0.1,0.1 0.1,88.9 88.9,88.9 88.9,0.1 0.1,0.1
  text "12V" at 46.75,84.55 h1.5
  text "GND" at 57.85,84.55 h1.5
  text "GND" at 7.85,64.55 h1.5
  text "12V" at 66.25,59.65 h1.5 r90
  text "12V" at 5.45,44.75 h1.5
  text "12V" at 15.65,40.05 h1.5 r90
  text "PWR" at 1.8,38.6 h2.3
  text "MK-1" at 1.9,34.8 h2.3
  text "5V" at 14.95,25.05 h1.5
  text "GND" at 68.05,15.95 h1.5 r90
  text "5V" at 10.25,7.05 h1.5
  text "GND" at 36.75,1.25 h1.5
  text "GND" at 50.15,1.25 h1.5
  text "GND" at 63.55,1.25 h1.5
  text "5V" at 32.55,1.15 h1.5
  text "5V" at 45.95,1.15 h1.5
  text "5V" at 59.35,1.15 h1.5

## Text inside footprints (layer, text, board x,y; h text height)
CONV1: Top Overlay "OUT-" at 24.5,48 h1; Top Overlay "IN-" at 65,48 h1; Top Overlay "IN+" at 65,23.5 h1; Top Overlay "OUT+" at 24.5,23.5 h1
Q1: Bottom Overlay "G" at 49.778,59.025 h1.5 r180